# EAGLE board MAX31855T_BREAKOUT (EAGLE 7.2.0)
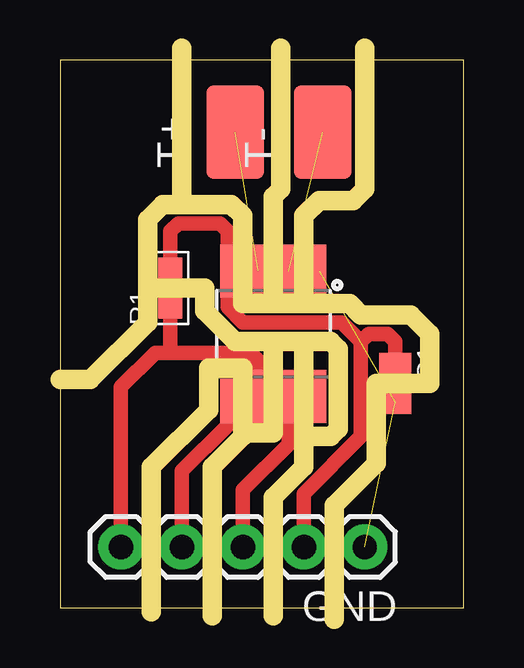
[diagram p0: board, top side]

Size 16.82 x 22.85 mm. Coordinates in mm from the lower left corner, seen from the top.
Outline: 0,0 16.82,0 16.82,22.85 0,22.85 0,0
Copper layers (1*16): Top 0.035mm / dielectric 1.5mm / Bottom 0.035mm
Design rules "default": minimum track width 10mil, minimum drill 24mil, track to track 8mil, track to pad 8mil, pad to pad 8mil, via to via 8mil, smd to smd 8mil, copper to edge 40mil, drill to drill 8mil, minimum pad ring 10mil, minimum via ring 8mil, stop-mask expansion 4mil, vias tented up to drill 0mil, thermal gap 10mil
Milling: 53 lines

## Footprints (pad centres in the part's own frame; a part is rotated, then mirrored left to right if it is on the bottom)
C0805-L = smd 0.95 x 1.35: 1 -0.8,0; 2 0.8,0
1X05 = drill 1.016 pad 1.88: 1 0,0; 2 2.54,0; 3 5.08,0; 4 7.62,0; 5 10.16,0
R0603-N = smd 0.95 x 1: 1 -0.8,0; 2 0.8,0
LUXEON-PAD = smd 3.9 x 2.4: P$1 0,0
SOIC8 = smd 0.61 x 2.21: 1 -1.905,-2.616; 2 -0.635,-2.616; 3 0.635,-2.616; 4 1.905,-2.616; 5 1.905,2.616; 6 0.635,2.616; 7 -0.635,2.616; 8 -1.905,2.616

## Placement (x,y rotation side)
C1  0.1µF  [C0805-L]  13.97,9.37 270 top
GND  [1X05]  12.7,2.54 180 top
R1  10k  [R0603-N]  4.6,13.34 90 top
T+  [LUXEON-PAD]  7.3,19.84 90 top
T-  [LUXEON-PAD]  10.95,19.84 90 top
U1  MAX31855K  [SOIC8]  8.89,11.43 180 top

## Library data of the parts
C1 R1 = passives-7351
GND T+ T- = SparkFun-Connectors
U1 = SparkFun-AnalogIC

## Nets
CS: GND.5 R1.1 U1.6
MISO: GND.3 U1.7
N$2: C1.2 GND.1 U1.1
N$3: T-.P$1 U1.2
N$4: T+.P$1 U1.3
N$5: C1.1 GND.2 R1.2 U1.4
SCK: GND.4 U1.5

## Tracks (layer width: path | path; a pad name or v marks a point on that pad's centre or on a via)
CS
  Top 0.61: U1.6 8.26,10.32 7.94,10.64 4.6,10.64 | 4.6,10.64 3.97,10.64 2.54,9.21 GND.5 | R1.1 4.6,10.64
MISO
  Top 0.61: GND.3 7.62,4.92 9.53,6.83 U1.7
N$2  (2 unrouted)
N$3  (1 unrouted)
N$4  (1 unrouted)
N$5
  Top 0.61: R1.2 4.6,15.72 4.92,16.03 6.67,16.03 6.99,15.72 U1.4 6.99,12.54 7.62,11.91 11.75,11.91 12.54,11.11 | GND.2 10.16,4.76 12.54,7.14 12.54,11.11 | C1.1 13.97,11.11 13.65,11.43 12.86,11.43 12.54,11.11
SCK
  Top 0.61: GND.4 5.08,5.71 6.99,7.62 U1.5